# Altium PCB CR00026.PcbDoc
Units mm, origin at the board's own origin, x right, y up, seen from the top; angles counter-clockwise.
Board outline 22 x 57.5 mm, 6 copper layers (L 01 S, L02 G, L03 P, L04 P, L05 G, L 06 S), stack 1.93 mm thick; 54 components, 74 nets, 240 pads, 79 vias.
Unrouted connection lines stored in the file: 38.
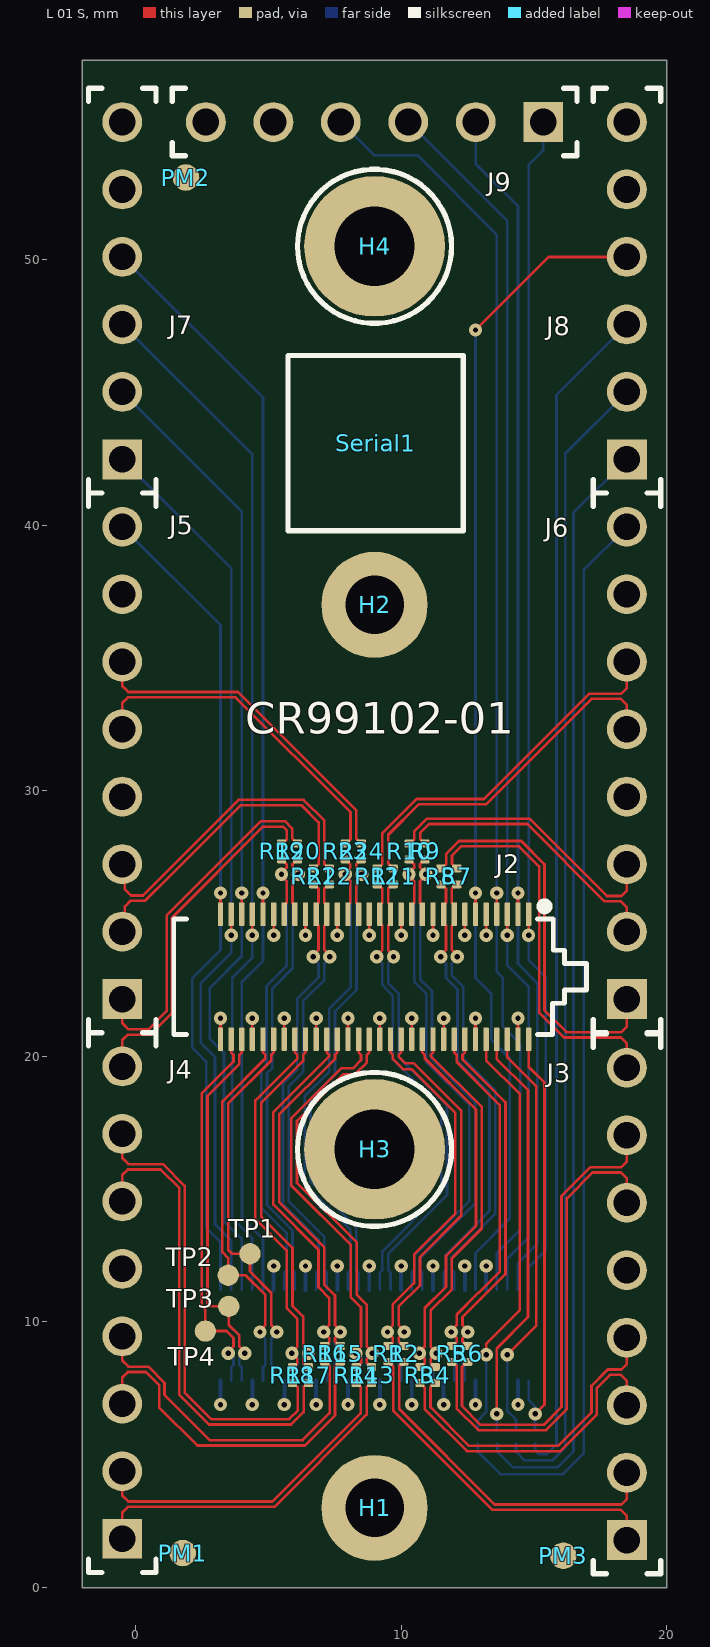
[diagram p0: L 01 S view]
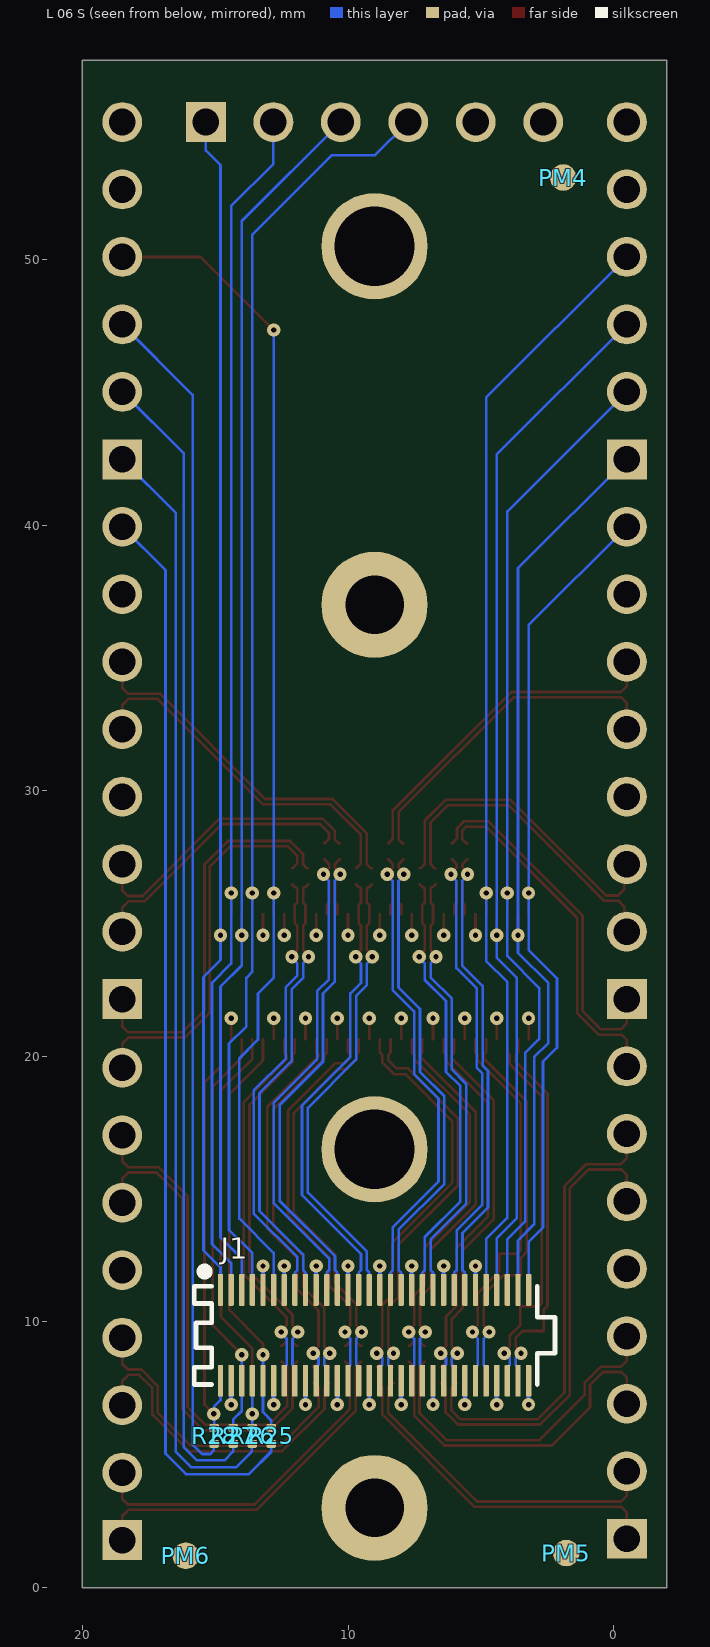
[diagram p1: L 06 S view, seen from below]
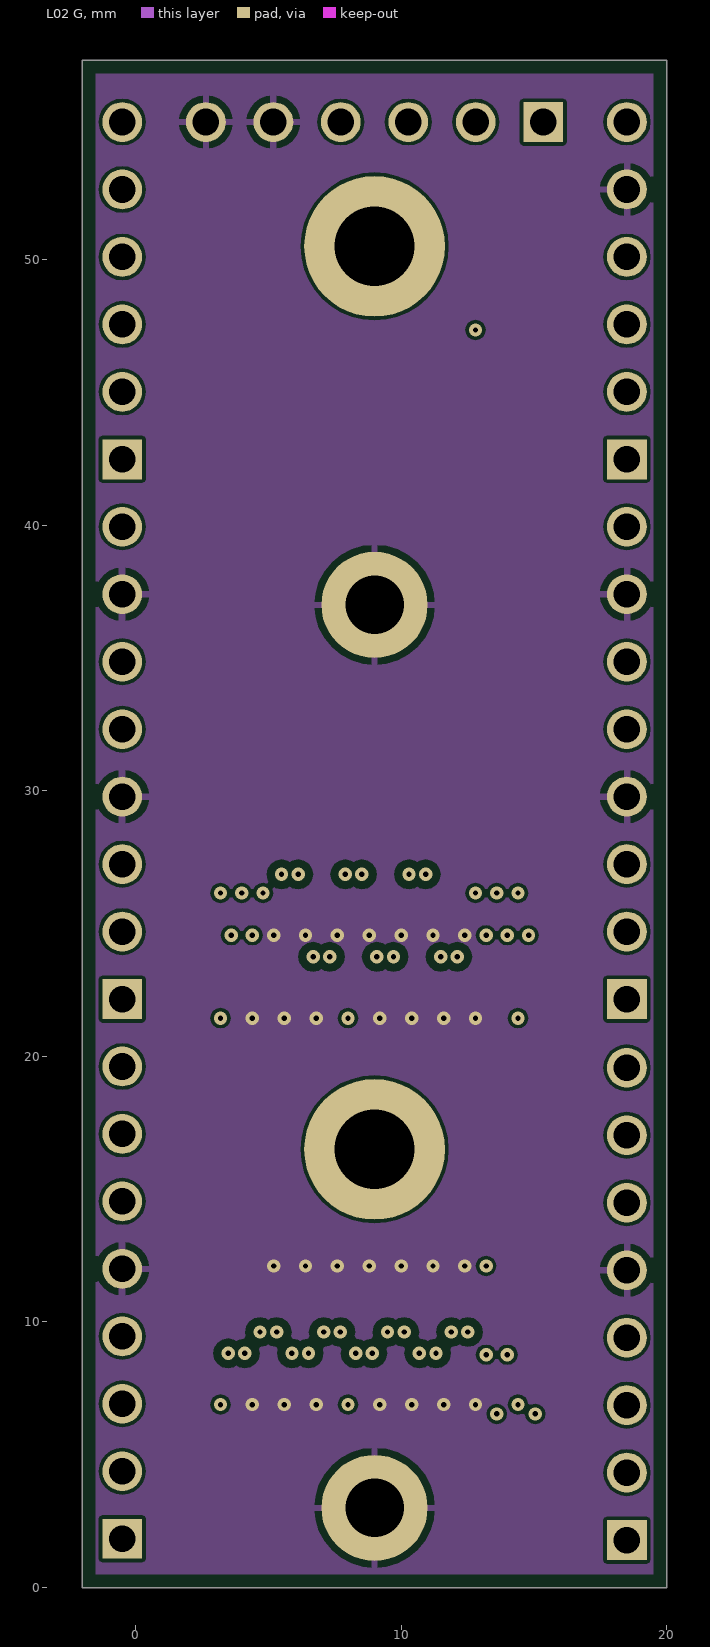
[diagram p2: L02 G]
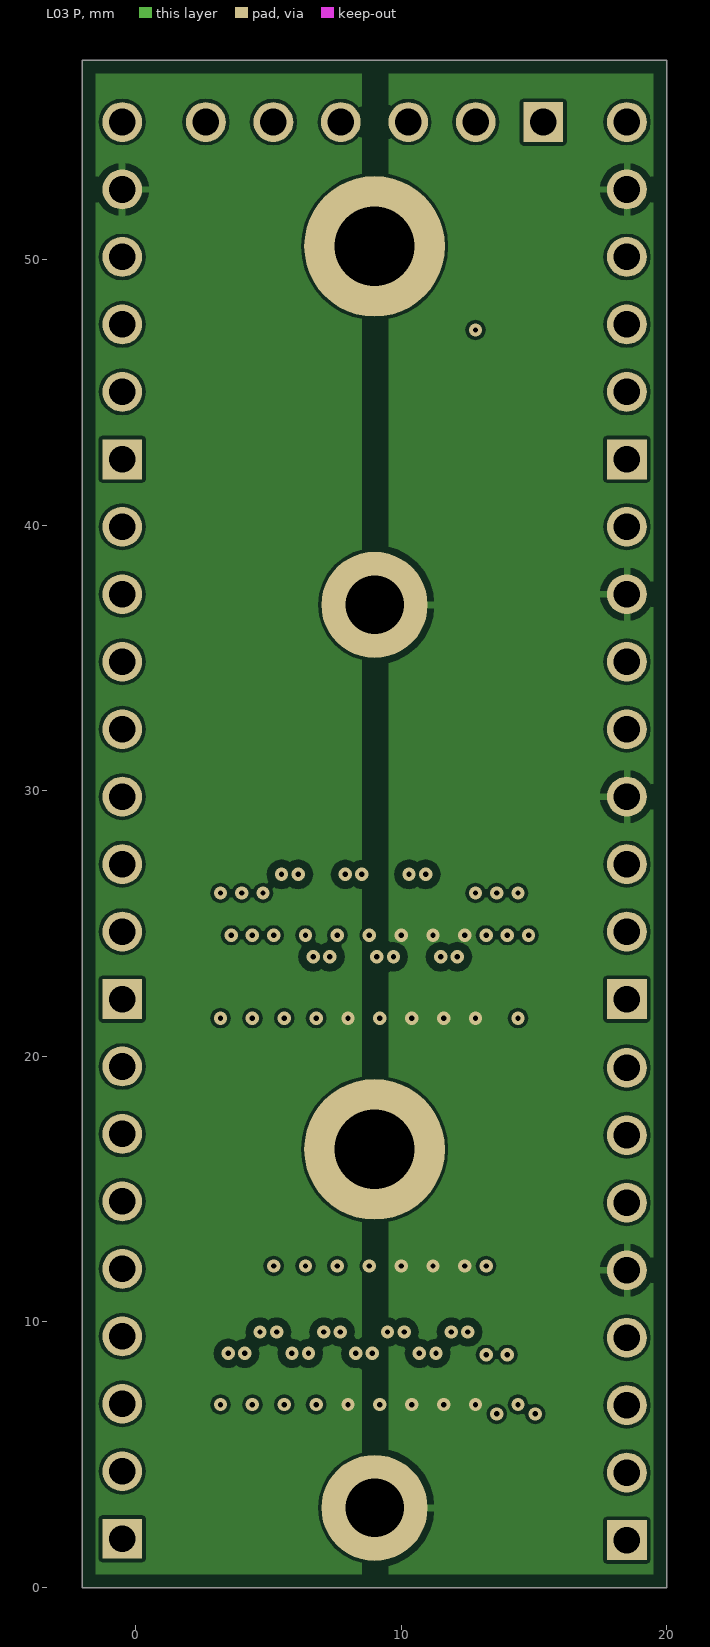
[diagram p3: L03 P]
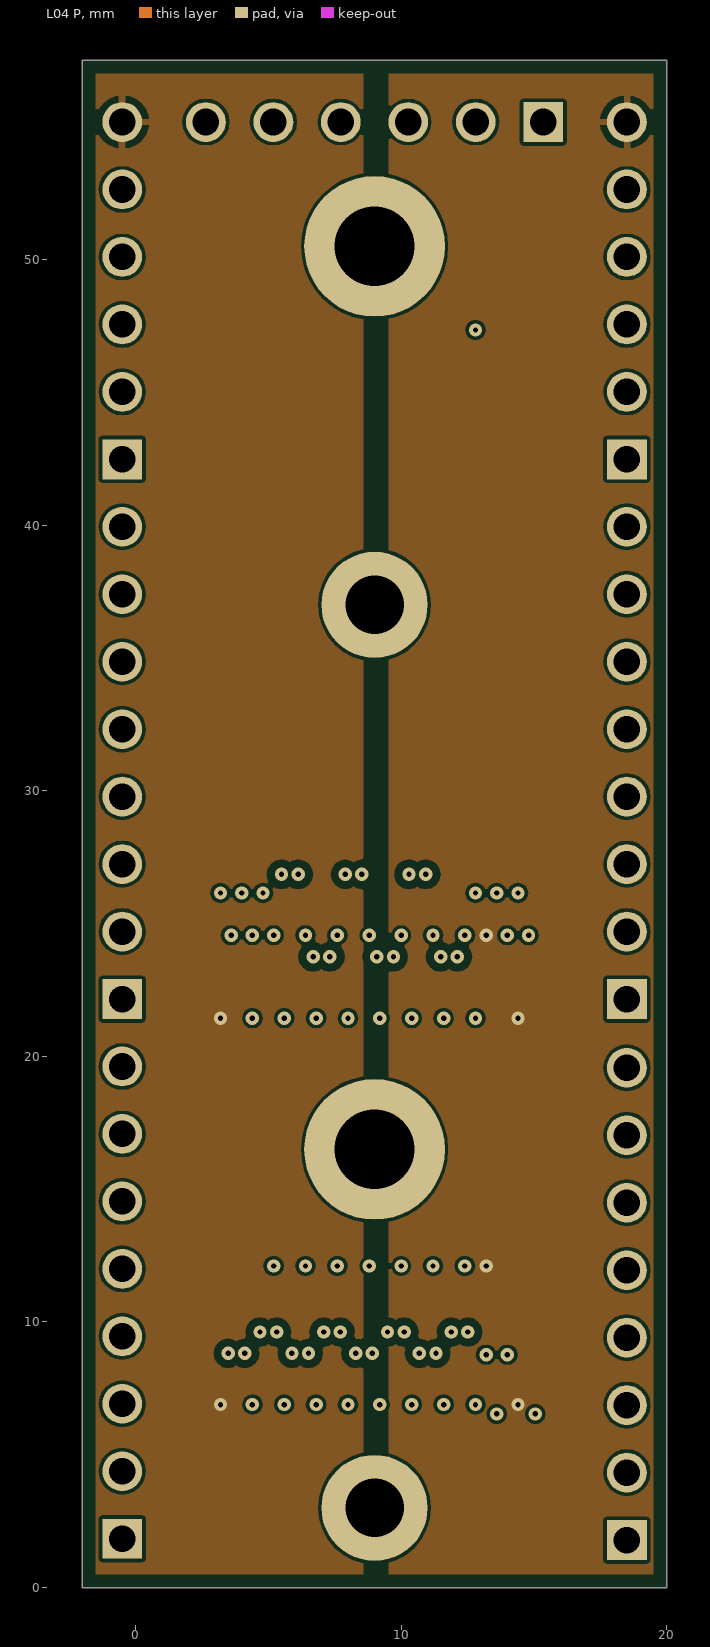
[diagram p4: L04 P]
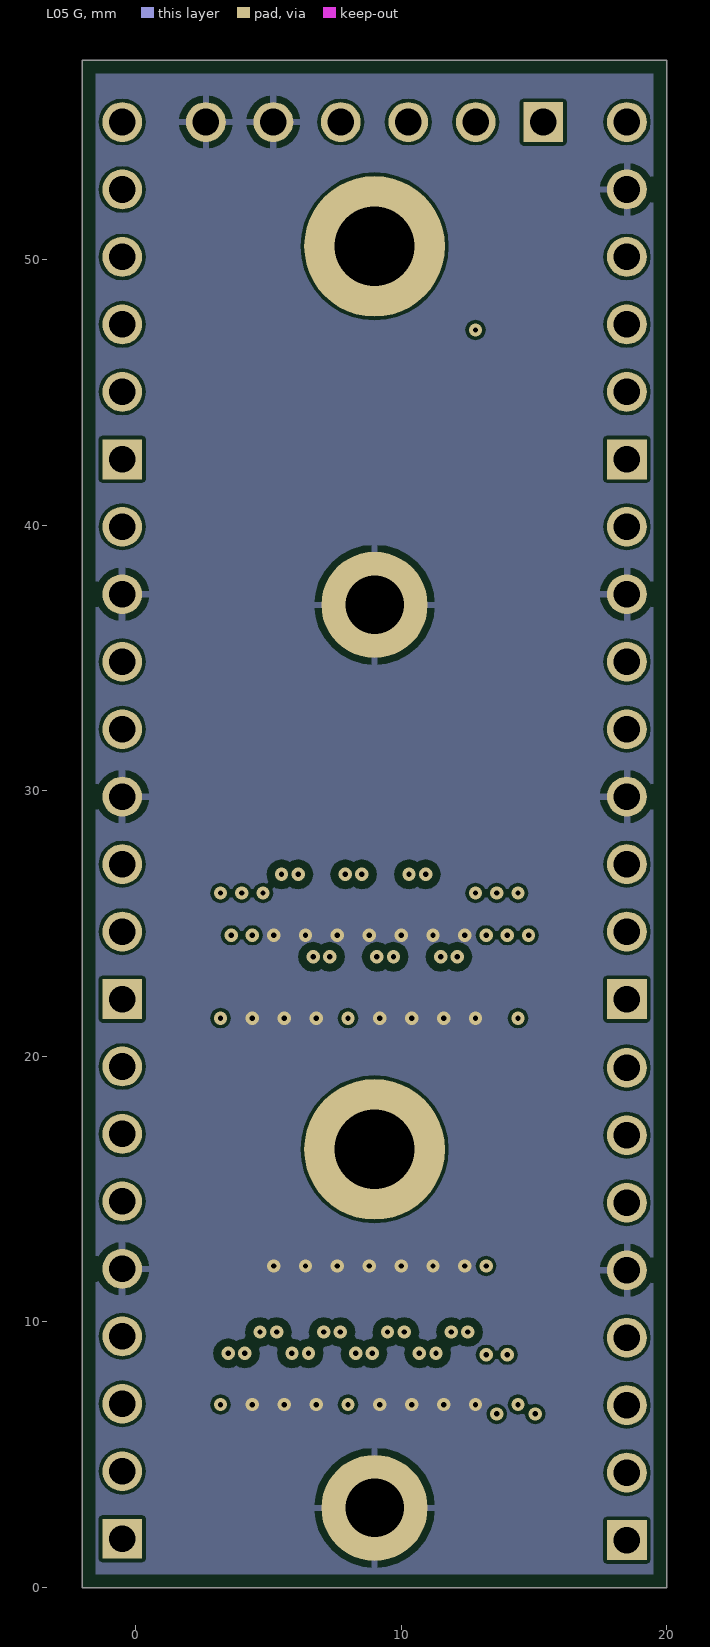
[diagram p5: L05 G]

## Layer stack, top to bottom
Top Solder: solder mask 0.0102, Solder Resist, Dk 3.5
L 01 S: signal copper 0.053
Dielectric 1: prepreg 0.0711, PP-006, Dk 4.1
L02 G: signal copper 0.035
Dielectric 3: prepreg 0.0711, PP-006, Dk 4.1
L03 P: signal copper 0.035
Dielectric1: core 1.4, FR-4, Dk 4.2
L04 P: signal copper 0.035
Dielectric 4: prepreg 0.0711, PP-006, Dk 4.1
L05 G: signal copper 0.035
Dielectric 2: prepreg 0.0711, PP-006, Dk 4.1
L 06 S: signal copper 0.053
Bottom Solder: solder mask 0.0102, Solder Resist, Dk 3.5

## Board outline
-2,0 -2,57.5 20,57.5 20,0

## Design rules (kind name [scope] priority, off if disabled: settings)
BoardOutlineClearance [All] p1: gap=0 except(0.5: Arc-OutlineEdge Track-OutlineEdge SMDPad-OutlineEdge THPad-OutlineEdge Via-OutlineEdge Fill-OutlineEdge Poly-OutlineEdge Region-OutlineEdge)
Clearance "HV Clearance" [(InNetClass('HV') AND InPolygon)] p1: gap=0.3
Clearance Clearance_ToUnplatedHole [IsPad and ( (HoleSize = 1.5) or (HoleSize = 3.25) ) vs (IsVia or IsTrack OR InPoly)] p2: gap=0.2
Clearance Clearance_DiffPair [(InDifferentialPairClass('All Differential Pairs')) vs (InPolygon)] p3: gap=0.3
Clearance [All] p4: gap=0.125 except(0.1: Track-Track Track-SMDPad Track-Via SMDPad-Via)
ComponentClearance ComponentClearance_logo [(HasFootprint('LOGO PRINT') or HasFootprint('FIDU-DOT - small'))] p1: gap=-0.05 collisioncheckmode=3 verticalgap=-0.1 showdistances=FALSE
ComponentClearance [All] p2: gap=-0.05 collisioncheckmode=3 verticalgap=0.254 showdistances=FALSE
DiffPairsRouting [All] p1: maxlimit=0.12 minlimit=0.12 mostfreqgap=0.12 toplayer_minwidth=0.1 toplayer_maxwidth=0.1 toplayer_prefwidth=0.1 midlayer1_minwidth=0.1 midlayer1_maxwidth=0.1 midlayer1_prefwidth=0.1 midlayer2_minwidth=0.1 midlayer2_maxwidth=0.1 midlayer2_prefwidth=0.1 midlayer3_minwidth=0.1 midlayer3_maxwidth=0.1 midlayer3_prefwidth=0.1 midlayer4_minwidth=0.1 midlayer4_maxwidth=0.1 midlayer4_prefwidth=0.1 bottomlayer_minwidth=0.1 bottomlayer_maxwidth=0.1 bottomlayer_prefwidth=0.1 maxuncoupledlength=4
FabricationTestPointUsage TestPointUsage [All] p1: valid=0 allowmultiple=FALSE
FabricationTestpoint Testpoint [All] p1: side=3 testpointundercomponent=TRUE minsize=1.016 maxsize=2.54 preferedsize=1.524 minholesize=0 maxholesize=1.016 preferedholesize=0.813 testpointgrid=0.025 allowsidetop=TRUE allowsidebottom=TRUE usegrid=TRUE gridtolerance=0
HoleSize [All] p1: absolutevalues=TRUE maxlimit=5 minlimit=0.2 maxpercent=80.000 minpercent=20.000
MinimumAnnularRing [All] p1: minimumring=0.15
MinimumSolderMaskSliver [All] p1: minsoldermaskwidth=0.1
PlaneClearance [All] p1: clearance=0.4
PlaneConnect [All] p1: planeconnectstyle=Direct reliefexpansion=0.508 reliefentries=4 reliefconductorwidth=0.254 reliefairgap=0.254
PolygonConnect [IsVia] p1: connectstyle=Direct reliefconductorwidth=0.254 reliefentries=4 polygonreliefangle="90 Angle" airgapwidth=0.254
PolygonConnect PolygonConnect_1 [All] p2: connectstyle=Relief reliefconductorwidth=0.254 reliefentries=4 polygonreliefangle="90 Angle" airgapwidth=0.254
RoutingCorners [All] p1: cornerstyle=Round minsetback=2 maxsetback=2
RoutingVias [All] p1: holewidth=0.3 width=0.6 viastyle="Through Hole" minholewidth=0.2 minwidth=0.5 maxholewidth=1 maxwidth=3
SilkToSilkClearance [All] p1: silktosilkclearance=0.025
SilkToSolderMaskClearance SilkscreenOverComponentPads [IsPad] p1: minsilkscreentomaskgap=0.01 clearancetoexposedcopper=TRUE
SolderMaskExpansion SolderMaskExpansion_VIA [(IsVia)] p1: expansion=0 soldermaskfromhole=TRUE
SolderMaskExpansion [All] p2: expansion=0
Width [All] p1: maxlimit=3 minlimit=0.1 preferedwidth=0.2 toplayer_prefwidth=0.1 midlayer1_minwidth=0.11 midlayer4_minwidth=0.11 bottomlayer_prefwidth=0.1 minimp=50.000000 maximp=50.000000 favimp=50.000000 checkconnectedcopper=TRUE
19 further rules are at their usual default settings.

## Classes and differential pairs
component class headers: J3 J4 J5 J6 J7 J8 J9 R1 R2 R3 R4 R5 R6 R7 R8 R9 R10 R11 R12 R13 R14 R15 R16 R17 R18 R19 R20 R21 R22 R23 R24 R25 R26 R27 R28 R? TP1 TP2 TP3 TP4
net class HS: A0_N A0_P A1_N A1_P A2_N A2_P A3_N A3_P A4_N A4_P A5_N A5_P B0_N B0_P B1_N B1_P B2_N B2_P B3_N B3_P B4_N B4_P B5_N B5_P RFU2_N RFU2_P RFU3_N RFU3_P
component class CR00026: PM1 PM2 PM3 PM4 PM5 PM6 Serial1
component class CRUVI: H1 H2 H3 H4 J1 J2 SNAP1 SNAP2
differential pair RFU3: +RFU3_P -RFU3_N
differential pair RFU2: +RFU2_P -RFU2_N
differential pair B5: +B5_P -B5_N
differential pair B4: +B4_P -B4_N
differential pair B3: +B3_P -B3_N
differential pair B2: +B2_P -B2_N
differential pair B1: +B1_P -B1_N
differential pair B0: +B0_P -B0_N
differential pair A5: +A5_P -A5_N
differential pair A4: +A4_P -A4_N
differential pair A3: +A3_P -A3_N
differential pair A2: +A2_P -A2_N
differential pair A1: +A1_P -A1_N
differential pair A0: +A0_P -A0_N

## Components (designator, comment, footprint, x,y, rotation, side; value= is the part's Value field where it differs from the comment)
H1 "Mount.Hole 2mm" MHole2_2mm 9,3 r0 top locked
H2 "Mount.Hole 2mm" MHole2_2mm 9,37 r0 top
H3 "Steel Spacer M2 5mm SMD" 9774050243 9,16.5 r0 top locked
H4 "Steel Spacer M2 5mm SMD" 9774050243 9,50.5 r0 top
J1 "ST4-30-1.50-L-D-P-TR" ST4-30-1_50-L-D 9,9.5 r180 bottom locked
J2 "SS4-30-3.50-L-D-K-TR" SS4-30-3_50-L-D 9,23 r180 top
J3 "Pin Header 2.54 1Row 8Pins" "STIFTLEISTE2_54 OG 1R-8V" 18.5,10.68 r90 top
J4 "Pin Header 2.54 1Row 8Pins" "STIFTLEISTE2_54 OG 1R-8V" -0.5,10.73 r90 top
J5 "Pin Header 2.54 1Row 8Pins" "STIFTLEISTE2_54 OG 1R-8V" -0.5,31.05 r90 top
J6 "Pin Header 2.54 1Row 8Pins" "STIFTLEISTE2_54 OG 1R-8V" 18.5,31.05 r90 top
J7 "Pin Header 2.54 1Row 6Pins" "STIFTLEISTE2_54 OG 1R-6" -0.5,48.83 r90 top
J8 "Pin Header 2.54 1Row 6Pins" "STIFTLEISTE2_54 OG 1R-6" 18.5,48.83 r90 top
J9 "Pin Header 2.54 1Row 6Pins" "STIFTLEISTE2_54 OG 1R-6" 9,55.18 r180 top
PM1 "FIDU-DOT - mini" "FIDU-DOT - mini" 1.78,1.3 r0 top
PM2 "FIDU-DOT - mini" "FIDU-DOT - mini" 1.9,53.09 r0 top
PM3 "FIDU-DOT - mini" "FIDU-DOT - mini" 16.11,1.2 r90 top
PM4 "FIDU-DOT - mini" "FIDU-DOT - mini" 1.9,53.09 r180 bottom
PM5 "FIDU-DOT - mini" "FIDU-DOT - mini" 1.78,1.3 r180 bottom
PM6 "FIDU-DOT - mini" "FIDU-DOT - mini" 16.11,1.2 r90 bottom
R1 "49R9" RESC0603X26N_V 9.51,8.8 r0 top
R2 "49R9" RESC0603X26N_V 10.11,8.8 r0 top
R3 "49R9" RESC0603X26N_V 10.71,8 r0 top
R4 "49R9" RESC0603X26N_V 11.285,8 r0 top
R5 "49R9" RESC0603X26N_V 11.91,8.8 r0 top
R6 "49R9" RESC0603X26N_V 12.51,8.8 r0 top
R7 "49R9" RESC0603X26N_V 12.1,26.78 r180 top
R8 "49R9" RESC0603X26N_V 11.5,26.78 r180 top
R9 "49R9" RESC0603X26N_V 10.9,27.72 r180 top
R10 "49R9" RESC0603X26N_V 10.3,27.72 r180 top
R11 "49R9" RESC0603X26N_V 9.7,26.78 r180 top
R12 "49R9" RESC0603X26N_V 9.1,26.78 r180 top
R13 "49R9" RESC0603X26N_V 8.885,8 r0 top
R14 "49R9" RESC0603X26N_V 8.31,8 r0 top
R15 "49R9" RESC0603X26N_V 7.71,8.8 r0 top
R16 "49R9" RESC0603X26N_V 7.123,8.8 r0 top
R17 "49R9" RESC0603X26N_V 6.51,8 r0 top
R18 "49R9" RESC0603X26N_V 5.91,8 r0 top
R19 "49R9" RESC0603X26N_V 5.5,27.72 r180 top
R20 "49R9" RESC0603X26N_V 6.1,27.72 r180 top
R21 "49R9" RESC0603X26N_V 6.7,26.78 r180 top
R22 "49R9" RESC0603X26N_V 7.3,26.78 r180 top
R23 "49R9" RESC0603X26N_V 7.9,27.72 r180 top
R24 "49R9" RESC0603X26N_V 8.5,27.72 r180 top
R25 "49R9" RESC0603X26N_V 12.89,5.715 r180 bottom
R26 "49R9" RESC0603X26N_V 13.607,5.715 r180 bottom
R27 "49R9" RESC0603X26N_V 14.323,5.715 r180 bottom
R28 "49R9" RESC0603X26N_V 15.04,5.715 r180 bottom
Serial1 "Serialnumber 6,3 x 6.3mm" Serial_6.3x6.3mm 9.04,43.09 r0 top
SNAP1 "SNAP CRUVI 3x" CRUVI_3X_SNAP 31.86,28 r0 top locked
SNAP2 "SNAP CRUVI 3x" CRUVI_3x_Snap 31.86,41.5 r0 top locked
TP1 "Testpoint 0.8mm" TP_0.8mm 4.31,12.57 r90 top
TP2 "Testpoint 0.8mm" TP_0.8mm 3.49,11.76 r90 top
TP3 "Testpoint 0.8mm" TP_0.8mm 3.51,10.59 r90 top
TP4 "Testpoint 0.8mm" TP_0.8mm 2.63,9.66 r90 top

## Footprints (in the part's own frame and the unit in brackets; to place one, negate y for a bottom-side part, rotate by r counter-clockwise, add the part's x,y. Pads: shape width x height; smd on the part's side, far side on the other; paste and mask are expansions set on the pad)
9774050243 [mm]
  round 5.3 / inner round 5.3 / far side round 4 hole 3: 1(0,0)
  silkscreen extent -2.9,-2.9 2.9,2.9, body extent -2.17,-2.17 2.18,2.17, height 5
CRUVI_3X_SNAP [mm]
CRUVI_3x_Snap [mm]
"FIDU-DOT - mini" [mm]
  round 1 smd paste-1: 0(0,0)
MHole2_2mm [mm]
  round 4 hole 2.2: 1(0,0)
RESC0603X26N_V [mm]
  rrect33% 0.35x0.3 smd: 1(0,0.3) 2(0,-0.3)
  body extent -0.16,-0.34 0.17,0.34, height 0.32
Serial_6.3x6.3mm [mm]
  silkscreen extent -3.3,-3.3 3.3,3.3, body extent -3,-3 3,3, height 0.21
SS4-30-3_50-L-D [mm]
  rrect33% 0.2x0.89 smd: 1(-5.8,-2.355) 2(-5.8,2.355) 3(-5.4,-2.355) 4(-5.4,2.355) 5(-5,-2.355) 6(-5,2.355) 7(-4.6,-2.355) 8(-4.6,2.355) 9(-4.2,-2.355) 10(-4.2,2.355) 11(-3.8,-2.355) 12(-3.8,2.355) 13(-3.4,-2.355) 14(-3.4,2.355) 15(-3,-2.355) 16(-3,2.355) 17(-2.6,-2.355) 18(-2.6,2.355) 19(-2.2,-2.355) 20(-2.2,2.355) 21(-1.8,-2.355) 22(-1.8,2.355) 23(-1.4,-2.355) 24(-1.4,2.355) 25(-1,-2.355) 26(-1,2.355) 27(-0.6,-2.355) 28(-0.6,2.355) 29(-0.2,-2.355) 30(-0.2,2.355) 31(0.2,-2.355) 32(0.2,2.355) 33(0.6,-2.355) 34(0.6,2.355) 35(1,-2.355) 36(1,2.355) 37(1.4,-2.355) 38(1.4,2.355) 39(1.8,-2.355) 40(1.8,2.355) 41(2.2,-2.355) 42(2.2,2.355) 43(2.6,-2.355) 44(2.6,2.355) 45(3,-2.355) 46(3,2.355) 47(3.4,-2.355) 48(3.4,2.355) 49(3.8,-2.355) 50(3.8,2.355) 51(4.2,-2.355) 52(4.2,2.355) 53(4.6,-2.355) 54(4.6,2.355) 55(5,-2.355) 56(5,2.355) 57(5.4,-2.355) 58(5.4,2.355) 59(5.8,-2.355) 60(5.8,2.355)
  silkscreen extent -7.98,-2.8 7.56,2.17, body extent -7.98,-2.5 7.56,2.5, height 3.98
ST4-30-1_50-L-D [mm]
  rrect33% 0.2x1.2 smd: 1(-5.8,1.71) 2(-5.8,-1.71) 3(-5.4,1.71) 4(-5.4,-1.71) 5(-5,1.71) 6(-5,-1.71) 7(-4.6,1.71) 8(-4.6,-1.71) 9(-4.2,1.71) 10(-4.2,-1.71) 11(-3.8,1.71) 12(-3.8,-1.71) 13(-3.4,1.71) 14(-3.4,-1.71) 15(-3,1.71) 16(-3,-1.71) 17(-2.6,1.71) 18(-2.6,-1.71) 19(-2.2,1.71) 20(-2.2,-1.71) 21(-1.8,1.71) 22(-1.8,-1.71) 23(-1.4,1.71) 24(-1.4,-1.71) 25(-1,1.71) 26(-1,-1.71) 27(-0.6,1.71) 28(-0.6,-1.71) 29(-0.2,1.71) 30(-0.2,-1.71) 31(0.2,1.71) 32(0.2,-1.71) 33(0.6,1.71) 34(0.6,-1.71) 35(1,1.71) 36(1,-1.71) 37(1.4,1.71) 38(1.4,-1.71) 39(1.8,1.71) 40(1.8,-1.71) 41(2.2,1.71) 42(2.2,-1.71) 43(2.6,1.71) 44(2.6,-1.71) 45(3,1.71) 46(3,-1.71) 47(3.4,1.71) 48(3.4,-1.71) 49(3.8,1.71) 50(3.8,-1.71) 51(4.2,1.71) 52(4.2,-1.71) 53(4.6,1.71) 54(4.6,-1.71) 55(5,1.71) 56(5,-1.71) 57(5.4,1.71) 58(5.4,-1.71) 59(5.8,1.71) 60(5.8,-1.71)
  silkscreen extent -6.79,-1.85 6.79,2.55, body extent -6.87,-2 6.71,2, height 3.56
"STIFTLEISTE2_54 OG 1R-6" [mm]
  rect 1.5x1.5 hole 1: 1(-6.35,0)
  round 1.5 hole 1: 2(-3.81,0) 3(-1.27,0) 4(1.27,0) 5(3.81,0) 6(6.35,0)
  silkscreen extent -7.62,-1.27 7.62,1.27, body extent -7.52,-1.27 7.72,1.23, height 8.2
"STIFTLEISTE2_54 OG 1R-8V" [mm]
  rect 1.5x1.5 hole 1: 1(-8.89,0)
  round 1.5 hole 1: 2(-6.35,0) 3(-3.81,0) 4(-1.27,0) 5(1.27,0) 6(3.81,0) 7(6.35,0) 8(8.89,0)
  silkscreen extent -10.16,-1.27 10.16,1.27, body extent -10.08,-1.23 10.24,1.27, height 8.2
TP_0.8mm [mm]
  round 0.8 smd paste-1: 1(0,0)

## Part data
H1 H2: library part 27273
H3 H4: library part 29745, "9774050243R"
J1: library part 29686
J2: library part 29747, "SS4-30-3.50-L-D-K"
J3 J4 J5 J6: library part 29846, "Stiftleiste versetzt 1-reihig, 8pol."
J7 J8 J9: library part 28042, "Stiftleiste gerade 1-reihig, 6pol"
PM1 PM2 PM3 PM4 PM5 PM6: library part 27037, "FIDU-DOT - MINI 0.5mm"
R1 R2 R3 R4 R5 R6 R7 R8 R9 R10 R11 R12 R13 R14 R15 R16 R17 R18 R19 R20 R21 R22 R23 R24 R25 R26 R27 R28: library part 26669, "WID SMD 49R9 1% 0,05W BF 0603 (0201)"
Serial1: library part 26753
SNAP1 SNAP2: library part 29977, "SNAP for CRUVI 3x"
TP1 TP2 TP3 TP4: library part 26289

## Via types
v1: diameter 0.5, hole 0.2, L 01 S to L 06 S, 79 vias

## Nets (pads, with @x,y where several pads share a name; then routed paths per layer and width w, separated by ;. In a path a pad name is that pad's centre, name@x,y a point inside that pad or via, vN(x,y) a via of type N, cw(c..) or ccw(c..) an arc to the next point about the centre after c; other vN are vias at no path point)
3.3V: J1.4 J1.9 J2.4 J2.9 J8.6 | length 3.4
  L 01 S w0.1: v1(13.2,24.56) J2.9 ; J2.4 v1(14.4,21.44)
  L 06 S w0.15: J1.9 v1(13.2,12.11) ; v1(14.4,6.89) J1.4
5V: J1.60 J2.60 J7.6 | length 1.7
  L 01 S w0.1: J2.60 v1(3.2,21.44)
  L 06 S w0.15: v1(3.2,6.89) J1.60
A0_N: J1.16 J2.16 R5.1 | length 15.1
  L 01 S w0.1: R5.1 11.935,9.1 12.09,9.255 12.09,9.4 11.888,9.602 v1(11.888,9.62) 11.888,9.676 12.09,9.879 12.09,10.074 12.09,10.273 12.922,11.104 12.924,11.104 13.71,11.89 13.71,18.179 12.09,19.799 12.09,20.06 12,20.15 J2.16
  L 06 S w0.1: v1(11.888,9.62) 11.888,9.564 12.09,9.361 12.09,8.38 12,8.29 J1.16
A0_P: J1.14 J2.14 R6.1 | length 15.1
  L 01 S w0.1: J2.14 12.4,20.15 12.31,20.06 12.31,19.89 13.93,18.27 13.93,11.799 13.015,10.884 13.013,10.884 12.31,10.181 12.31,9.983 12.31,9.879 12.513,9.676 v1(12.513,9.62) 12.513,9.603 12.31,9.4 12.31,9.275 12.485,9.1 R6.1
  L 06 S w0.1: J1.14 12.4,8.29 12.31,8.38 12.31,9.361 12.513,9.564 v1(12.513,9.62)
A1_N: J1.22 J2.22 R3.1 | length 15.4
  L 01 S w0.1: R3.1 10.735,8.3 10.89,8.455 10.89,8.6 10.688,8.802 v1(10.688,8.82) 10.688,8.876 10.89,9.079 10.89,9.505 10.89,10.52 11.69,11.32 11.69,12.491 12.82,13.621 12.82,18 10.89,19.93 10.89,20.06 10.8,20.15 J2.22
  L 06 S w0.1: v1(10.688,8.82) 10.74,8.82 10.89,8.67 10.89,8.38 10.8,8.29 J1.22
A1_P: J1.20 J2.20 R4.1 | length 15.4
  L 01 S w0.1: J2.20 11.2,20.15 11.11,20.06 11.11,20.021 13.04,18.091 13.04,13.53 11.91,12.4 11.91,11.229 11.11,10.429 11.11,9.414 11.11,9.079 11.313,8.876 v1(11.313,8.82) 11.313,8.803 11.11,8.6 11.11,8.475 R4.1 R4.1@11.31,8.3
  L 06 S w0.1: J1.20 11.2,8.29 11.11,8.38 11.11,8.67 11.26,8.82 v1(11.313,8.82)
A2_N: J1.28 J2.28 R1.1 | length 15.9
  L 01 S w0.1: R1.1 9.535,9.1 9.69,9.255 9.69,9.4 9.488,9.602 v1(9.488,9.62) 9.488,9.676 9.69,9.879 9.69,10.12 9.69,10.671 10.49,11.471 10.49,12.541 12.04,14.091 12.04,17.87 10.39,19.52 10.069,19.52 9.69,19.899 9.69,20.06 9.6,20.15 J2.28
  L 06 S w0.1: v1(9.488,9.62) 9.488,9.564 9.69,9.361 9.69,8.38 9.6,8.29 J1.28
A2_P: J1.26 J2.26 R2.1 | length 15.9
  L 01 S w0.1: J2.26 10,20.15 9.91,20.06 9.91,19.99 10.16,19.74 10.481,19.74 12.26,17.961 12.26,14 10.71,12.45 10.71,11.38 9.91,10.58 9.91,10.029 9.91,9.879 10.113,9.676 v1(10.113,9.62) 10.113,9.603 9.91,9.4 9.91,9.275 10.085,9.1 R2.1
  L 06 S w0.1: J1.26 10,8.29 9.91,8.38 9.91,9.361 10.113,9.564 v1(10.113,9.62)
A3_N: J1.34 J2.34 R14.1 | length 16.3
  L 01 S w0.1: R14.1 8.335,8.3 8.49,8.455 8.49,8.6 8.288,8.802 v1(8.288,8.82) 8.288,8.876 8.49,9.079 8.49,9.795 8.49,10.55 8.11,10.93 8.11,12.899 5.86,15.149 5.86,17.666 7.744,19.55 8.18,19.55 8.49,19.86 8.49,20.06 8.4,20.15 J2.34
  L 06 S w0.1: v1(8.288,8.82) 8.34,8.82 8.49,8.67 8.49,8.38 8.4,8.29 J1.34
A3_P: J1.32 J2.32 R13.1 | length 16.3
  L 01 S w0.1: J2.32 8.8,20.15 8.71,20.06 8.71,19.769 8.271,19.33 7.835,19.33 6.08,17.575 6.08,15.24 8.33,12.99 8.33,11.021 8.71,10.641 8.71,9.704 8.71,9.079 8.913,8.876 v1(8.913,8.82) 8.913,8.803 8.71,8.6 8.71,8.475 R13.1 R13.1@8.91,8.3
  L 06 S w0.1: J1.32 8.8,8.29 8.71,8.38 8.71,8.67 8.86,8.82 v1(8.913,8.82)
A4_N: J1.40 J2.40 R16.1 | length 15.5
  L 01 S w0.1: R16.1@7.11,9.1 7.135,9.1 7.29,9.255 7.29,9.4 7.088,9.602 v1(7.088,9.62) 7.088,9.676 7.29,9.879 7.29,10.91 6.89,11.31 6.89,12.72 5.19,14.42 5.19,17.901 7.29,20.001 7.29,20.06 7.2,20.15 J2.40
  L 06 S w0.1: v1(7.088,9.62) 7.088,9.564 7.29,9.361 7.29,8.38 7.2,8.29 J1.40
A4_P: J1.38 J2.38 R15.1 | length 15.5
  L 01 S w0.1: J2.38 7.6,20.15 7.51,20.06 7.51,19.91 5.41,17.81 5.41,14.511 7.11,12.811 7.11,11.401 7.51,11.001 7.51,9.879 7.713,9.676 v1(7.713,9.62) 7.713,9.603 7.51,9.4 7.51,9.275 7.685,9.1 R15.1
  L 06 S w0.1: J1.38 7.6,8.29 7.51,8.38 7.51,9.361 7.713,9.564 v1(7.713,9.62)
A5_N: J1.46 J2.46 R18.1 | length 15.1
  L 01 S w0.1: R18.1 5.935,8.3 6.09,8.455 6.09,8.6 5.888,8.802 v1(5.888,8.82) 5.888,8.876 6.09,9.079 6.09,10.119 5.69,10.519 5.69,12.699 4.51,13.879 4.51,18.34 6.09,19.92 6.09,20.06 6,20.15 J2.46
  L 06 S w0.1: v1(5.888,8.82) 5.94,8.82 6.09,8.67 6.09,8.38 6,8.29 J1.46
A5_P: J1.44 J2.44 R17.1 | length 15.1
  L 01 S w0.1: J2.44 6.4,20.15 6.31,20.06 6.31,19.829 4.73,18.249 4.73,13.97 5.91,12.79 5.91,10.61 6.31,10.21 6.31,9.079 6.513,8.876 v1(6.513,8.82) 6.513,8.803 6.31,8.6 6.31,8.475 6.485,8.3 R17.1
  L 06 S w0.1: J1.44 6.4,8.29 6.31,8.38 6.31,8.67 6.46,8.82 v1(6.513,8.82)
B0_N: J1.17 J2.17 R8.1 | length 17
  L 01 S w0.1: v1(11.487,23.751) 11.487,23.808 11.69,24.01 11.69,24.92 11.6,25.01 J2.17 11.6,25.7 11.69,25.79 11.69,26.18 11.69,26.321 11.631,26.38 11.6,26.38 R8.1
  L 06 S w0.1: v1(11.487,23.751) 11.487,23.695 11.69,23.493 11.69,22.949 12.12,22.519 12.12,19.829 13.33,18.619 13.33,14.18 11.69,12.54 11.69,11.95 11.6,11.86 J1.17
B0_P: J1.15 J2.15 R7.1 | length 17
  L 01 S w0.1: R7.1 12,26.38 11.969,26.38 11.91,26.321 11.91,26.089 11.91,25.79 12,25.7 J2.15 12,25.01 11.91,24.92 11.91,24.01 12.112,23.808 v1(12.112,23.751)
  L 06 S w0.1: J1.15 12,11.86 11.91,11.95 11.91,12.449 13.55,14.089 13.55,18.71 12.34,19.92 12.34,22.61 11.91,23.04 11.91,23.493 12.112,23.695 v1(12.112,23.751)
B1_N: J1.23 J2.23 R10.1 | length 19.8
  L 01 S w0.1: R10.1 10.325,27.42 10.425,27.32 10.425,27.295 10.49,27.23 10.49,27.112 10.297,26.92 v1(10.297,26.854) 10.297,26.788 10.49,26.595 10.49,25.79 10.4,25.7 J2.23
  L 06 S w0.1: v1(10.297,26.854) 10.297,26.797 10.5,26.595 10.5,22.81 10.94,22.37 10.94,19.799 12.57,18.169 12.57,14.561 10.49,12.481 10.49,11.95 10.4,11.86 J1.23
B1_P: J1.21 J2.21 R9.1 | length 19.9
  L 01 S w0.1: J2.21 10.8,25.7 10.71,25.79 10.71,26.595 10.922,26.807 v1(10.922,26.854) 10.922,26.9 10.71,27.112 10.71,27.23 10.775,27.295 10.775,27.32 10.875,27.42 R9.1
  L 06 S w0.1: J1.21 10.8,11.86 10.71,11.95 10.71,12.39 12.79,14.47 12.79,18.26 11.16,19.89 11.16,22.461 10.72,22.901 10.72,26.595 10.922,26.798 v1(10.922,26.854)
B2_N: J1.29 J2.29 R12.1 | length 17.5
  L 01 S w0.1: v1(9.088,23.751) 9.088,23.808 9.29,24.01 9.29,24.92 9.2,25.01 J2.29 9.2,25.7 9.29,25.79 9.29,26.18 9.29,26.321 9.231,26.38 9.2,26.38 R12.1
  L 06 S w0.1: v1(9.088,23.751) 9.088,23.695 9.29,23.493 9.29,22.68 9.69,22.28 9.69,19.879 11.51,18.059 11.51,14.871 9.29,12.651 9.29,11.95 9.2,11.86 J1.29
B2_P: J1.27 J2.27 R11.1 | length 17.5
  L 01 S w0.1: R11.1 9.6,26.38 9.569,26.38 9.51,26.321 9.51,26.089 9.51,25.79 9.6,25.7 J2.27 9.6,25.01 9.51,24.92 9.51,24.01 9.713,23.808 v1(9.713,23.751)
  L 06 S w0.1: J1.27 9.6,11.86 9.51,11.95 9.51,12.56 11.73,14.78 11.73,18.15 9.91,19.97 9.91,22.371 9.51,22.771 9.51,23.493 9.713,23.695 v1(9.713,23.751)
B3_N: J1.35 J2.35 R23.1 | length 19.5
  L 01 S w0.1: R23.1 7.925,27.42 8.025,27.32 8.025,27.295 8.09,27.23 8.09,27.112 7.897,26.92 v1(7.897,26.854) 7.897,26.788 8.09,26.595 8.09,25.79 8,25.7 J2.35
  L 06 S w0.1: v1(7.897,26.854) 7.897,26.797 8.1,26.595 8.1,22.6 7.29,21.79 7.29,19.42 6.37,18.5 6.37,15.199 8.09,13.479 8.09,11.95 8,11.86 J1.35
B3_P: J1.33 J2.33 R24.1 | length 19.6
  L 01 S w0.1: J2.33 8.4,25.7 8.31,25.79 8.31,26.595 8.522,26.807 v1(8.522,26.854) 8.522,26.9 8.31,27.112 8.31,27.23 8.375,27.295 8.375,27.32 8.475,27.42 R24.1
  L 06 S w0.1: J1.33 8.4,11.86 8.31,11.95 8.31,13.57 6.59,15.29 6.59,18.409 7.51,19.329 7.51,21.699 8.32,22.509 8.32,26.595 8.522,26.798 v1(8.522,26.854)
B4_N: J1.41 J2.41 R21.1 | length 16.8
  L 01 S w0.1: v1(6.688,23.751) 6.688,23.808 6.89,24.01 6.89,24.92 6.8,25.01 J2.41 6.8,25.7 6.89,25.79 6.89,26.18 6.89,26.321 6.831,26.38 6.8,26.38 R21.1
  L 06 S w0.1: v1(6.688,23.751) 6.688,23.695 6.89,23.493 6.89,22.971 6.09,22.171 6.09,19.51 5.55,18.97 5.55,14.45 6.89,13.11 6.89,11.95 6.8,11.86 J1.41
B4_P: J1.39 J2.39 R22.1 | length 16.8
  L 01 S w0.1: R22.1 7.2,26.38 7.169,26.38 7.11,26.321 7.11,26.089 7.11,25.79 7.2,25.7 J2.39 7.2,25.01 7.11,24.92 7.11,24.01 7.313,23.808 v1(7.313,23.751)
  L 06 S w0.1: J1.39 7.2,11.86 7.11,11.95 7.11,13.201 5.77,14.541 5.77,18.879 6.31,19.419 6.31,22.08 7.11,22.88 7.11,23.493 7.313,23.695 v1(7.313,23.751)
B5_N: J1.47 J2.47 R19.1 | length 18.9
  L 01 S w0.1: R19.1 5.525,27.42 5.625,27.32 5.625,27.295 5.69,27.23 5.69,27.112 5.497,26.92 v1(5.497,26.854) 5.497,26.788 5.69,26.595 5.69,25.79 5.6,25.7 J2.47
  L 06 S w0.1: v1(5.497,26.854) 5.497,26.797 5.7,26.595 5.7,23.421 4.93,22.651 4.93,19.659 4.73,19.459 4.73,14.31 5.69,13.35 5.69,11.95 5.6,11.86 J1.47
B5_P: J1.45 J2.45 R20.1 | length 18.9
  L 01 S w0.1: J2.45 6,25.7 5.91,25.79 5.91,26.595 6.122,26.807 v1(6.122,26.854) 6.122,26.9 5.91,27.112 5.91,27.23 5.975,27.295 5.975,27.32 6.075,27.42 R20.1
  L 06 S w0.1: J1.45 6,11.86 5.91,11.95 5.91,13.441 4.95,14.401 4.95,19.368 5.15,19.568 5.15,22.56 5.92,23.33 5.92,26.595 6.122,26.798 v1(6.122,26.854)
GND: H1.1 H2.1 J1.12 J1.13 J1.18 J1.19 J1.24 J1.25 J1.30 J1.31 J1.37 J1.42 J1.43 J1.48 J1.49 J1.54 J2.12 J2.13 J2.18 J2.19 J2.24 J2.25 J2.30 J2.31 J2.37 J2.42 J2.43 J2.48 J2.49 J2.54 J3.5 J4.5 J5.4 J5.7 J6.4 J6.7 J8.5 J9.5 J9.6 | length 23.7
  L 01 S w0.1: J2.54 v1(4.4,21.44) ; v1(5.2,24.56) J2.49 ; J2.48 v1(5.6,21.44) ; v1(6.4,24.56) J2.43 ; J2.42 v1(6.8,21.44) ; v1(7.6,24.56) J2.37 ; v1(8.8,24.56) J2.31 ; J2.30 v1(9.2,21.44) ; v1(10,24.56) J2.25 ; J2.24 v1(10.4,21.44) ; v1(11.2,24.56) J2.19 ; J2.18 v1(11.6,21.44) ; v1(12.4,24.56) J2.13 ; J2.12 v1(12.8,21.44)
  L 06 S w0.15: v1(4.4,6.89) J1.54 ; J1.49 v1(5.2,12.11) ; v1(5.6,6.89) J1.48 ; J1.43 v1(6.4,12.11) ; v1(6.8,6.89) J1.42 ; J1.37 v1(7.6,12.11) ; J1.31 v1(8.8,12.11) ; v1(9.2,6.89) J1.30 ; J1.25 v1(10,12.11) ; v1(10.4,6.89) J1.24 ; J1.19 v1(11.2,12.11) ; v1(11.6,6.89) J1.18 ; J1.13 v1(12.4,12.11) ; v1(12.8,6.89) J1.12
HSI: J1.10 J2.10 R25.1 | length 15.8
  L 01 S w0.1: J2.10 13.2,19.85 14.47,18.58 14.47,10.45 13.2,9.18 v1(13.2,8.77)
  L 06 S w0.1: R25.1 12.89,6.3 13.2,6.61 13.2,7.056 J1.10 v1(13.2,8.77)
HSIO: J1.2 J2.2 R28.1 | length 16.4
  L 01 S w0.1: J2.2 14.8,19.61 15.4,19.01 15.4,6.89 v1(15.05,6.54)
  L 06 S w0.1: J1.2 14.8,7.056 15.04,6.816 R28.1
HSO: J1.6 J2.6 R27.1 | length 15.7
  L 01 S w0.1: v1(14,8.77) 15.09,9.86 15.09,18.86 14,19.95 J2.6
  L 06 S w0.1: v1(14,8.77) J1.6 14,6.65 14.323,6.327 R27.1
HSRST: J1.8 J2.8 R26.1 | length 16.9
  L 01 S w0.1: J2.8 13.6,19.91 14.78,18.73 14.78,10.19 13.6,9.01 v1(13.6,6.54)
  L 06 S w0.1: J1.8@13.603,7.787 13.603,6.018 R26.1
JTAGEN: J1.57 J2.57 J7.1 | length 34.7
  L 01 S w0.1: v1(3.6,24.56) J2.57
  L 06 S w0.1: J7.1 3.6,38.38 v1(3.6,24.56) 3.6,23.9 2.46,22.76 2.46,20.51 2.99,19.98 2.99,13.68 3.6,13.07 J1.57
NetJ3_1: J3.1 R1.2 | length 13.3
  L 01 S w0.1: R1.2 9.535,8.5 9.71,8.325 9.71,6.657 13.437,2.93 18.27,2.93 18.5,2.7 J3.1
NetJ3_2: J3.2 R2.2 | length 13
  L 01 S w0.1: R2.2 10.085,8.5 9.93,8.345 9.93,6.72 13.52,3.13 18.29,3.13 18.5,3.34 J3.2
NetJ3_3: J3.3 R3.2 | length 12.1
  L 01 S w0.1: R3.2 10.885,7.525 10.885,6.732 12.477,5.14 15.993,5.14 17.366,6.514 17.366,7.514 17.863,8.01 18.27,8.01 18.5,7.78 J3.3
NetJ3_4: J3.4 R4.2 | length 11.8
  L 01 S w0.1: R4.2 11.26,7.7 11.105,7.545 11.105,6.795 12.56,5.34 15.91,5.34 17.166,6.596 17.166,7.596 17.78,8.21 18.29,8.21 18.5,8.42 J3.4
NetJ3_6: J3.6 R5.2 | length 18.3
  L 01 S w0.1: R5.2 11.935,8.5 12.09,8.345 12.09,6.752 12.912,5.93 15.453,5.93 16.24,6.717 16.24,14.657 17.213,15.63 18.27,15.63 18.5,15.4 J3.6
NetJ3_7: J3.7 R6.2 | length 18
  L 01 S w0.1: R6.2 12.485,8.5 12.29,8.305 12.29,6.834 12.994,6.13 15.37,6.13 16.04,6.8 16.04,14.74 17.13,15.83 18.29,15.83 18.5,16.04 J3.7
NetJ3_8: J3.8 R7.2 | length 14.5
  L 01 S w0.1: R7.2@12.09,27.08 11.915,27.255 11.915,27.562 12.263,27.91 14.44,27.91 15.2,27.15 15.2,21.65 16.14,20.71 18.27,20.71 18.5,20.48 J3.8
NetJ4_1: J4.1 R13.2 | length 13
  L 01 S w0.1: J4.1 -0.5,2.83 -0.29,3.04 5.233,3.04 8.705,6.512 8.705,7.545 8.86,7.7 R13.2
NetJ4_2: J4.2 R14.2 | length 12.6
  L 01 S w0.1: J4.2 -0.5,3.47 -0.27,3.24 5.15,3.24 8.485,6.575 8.485,7.525 R14.2 R14.2@8.285,7.7
NetJ4_3: J4.3 R15.2 | length 13.3
  L 01 S w0.1: J4.3 -0.5,7.91 -0.29,8.12 0.397,8.12 0.89,7.627 0.89,6.787 2.327,5.35 6.373,5.35 7.51,6.487 7.51,8.325 7.685,8.5 R15.2
NetJ4_4: J4.4 R16.2 | length 12.7
  L 01 S w0.1: J4.4 -0.5,8.55 -0.27,8.32 0.48,8.32 1.09,7.71 1.09,7.25 2.79,5.55 6.29,5.55 7.31,6.57 7.31,8.325 7.135,8.5 R16.2@7.11,8.5
NetJ4_6: J4.6 R17.2 | length 17.8
  L 01 S w0.1: J4.6 -0.5,15.53 -0.29,15.74 0.947,15.74 1.65,15.037 1.65,7.257 2.767,6.14 5.863,6.14 6.33,6.607 6.33,7.545 6.485,7.7 R17.2
NetJ4_7: J4.7 R18.2 | length 17.4
  L 01 S w0.1: J4.7 -0.5,16.17 -0.27,15.94 1.03,15.94 1.85,15.12 1.85,7.34 2.85,6.34 5.78,6.34 6.11,6.67 6.11,7.525 5.935,7.7 R18.2
NetJ4_8: J4.8 R19.2 | length 13.3
  L 01 S w0.1: J4.8 -0.5,20.61 -0.29,20.82 0.563,20.82 1.37,21.627 1.37,25.22 4.8,28.65 5.55,28.65 5.695,28.505 5.695,28.175 5.54,28.02 R19.2@5.515,28.02
NetJ5_1: J5.1 R20.2 | length 13.5
  L 01 S w0.1: J5.1 -0.5,21.25 -0.27,21.02 0.48,21.02 1.17,21.71 1.17,25.303 4.727,28.86 5.623,28.86 5.895,28.588 5.895,28.215 5.975,28.135 5.975,28.12 6.075,28.02 R20.2@6.09,28.02
NetJ5_2: J5.2 R21.2 | length 11.9
  L 01 S w0.1: J5.2@-0.4,24.66 -0.4,25.65 -0.19,25.86 0.363,25.86 1.31,26.807 3.963,29.46 6.24,29.46 6.895,28.805 6.895,27.235 6.74,27.08 R21.2@6.715,27.08
NetJ5_3: J5.3 R22.2 | length 12.2
  L 01 S w0.1: J5.3@-0.4,27.2 -0.4,26.29 -0.17,26.06 0.28,26.06 3.88,29.66 6.323,29.66 7.11,28.873 7.11,27.245 7.275,27.08 R22.2@7.29,27.08
NetJ5_5: J5.5 R23.2 | length 12.7
  L 01 S w0.1: J5.5 -0.5,33.31 -0.29,33.52 3.77,33.52 8.095,29.195 8.095,28.175 7.94,28.02 R23.2@7.915,28.02
NetJ5_6: J5.6 R24.2 | length 13
  L 01 S w0.1: J5.6 -0.5,33.95 -0.27,33.72 3.853,33.72 8.315,29.258 8.315,28.195 8.375,28.135 8.375,28.12 8.475,28.02 R24.2@8.49,28.02
NetJ6_1: J6.1 R8.2 | length 14.9
  L 01 S w0.1: R8.2@11.515,27.08 11.54,27.08 11.695,27.235 11.695,27.625 12.18,28.11 14.523,28.11 15.4,27.233 15.4,21.733 16.223,20.91 18.29,20.91 18.5,21.12 J6.1@18.5,22.11
NetJ6_2: J6.2 R9.2 | length 10.6
  L 01 S w0.1: R9.2@10.89,28.02 10.715,28.195 10.715,28.415 11.05,28.75 14.75,28.75 17.66,25.84 18.27,25.84 18.5,25.61 J6.2
NetJ6_3: J6.3 R10.2 | length 11
  L 01 S w0.1: R10.2@10.315,28.02 10.34,28.02 10.495,28.175 10.495,28.478 10.967,28.95 14.833,28.95 17.743,26.04 18.29,26.04 18.5,26.25 J6.3
NetJ6_5: J6.5 R11.2 | length 13.4
  L 01 S w0.1: R11.2@9.69,27.08 9.515,27.255 9.515,28.345 10.66,29.49 13.2,29.49 17.17,33.46 18.27,33.46 18.5,33.23 J6.5
NetJ6_6: J6.6 R12.2 | length 13.9
  L 01 S w0.1: R12.2@9.115,27.08 9.14,27.08 9.295,27.235 9.295,28.408 10.577,29.69 13.117,29.69 17.087,33.66 18.29,33.66 18.5,33.87 J6.6
NetJ6_8: J6.8 R25.2 | length 40.5
  L 06 S w0.1: R25.2 12.89,5.115 13.735,4.27 16.1,4.27 16.87,5.04 16.87,38.31 J6.8
NetJ8_1: J8.1 R26.2 | length 41.8
  L 06 S w0.1: R26.2 13.626,5.395 13.626,5.114 14.21,4.53 15.89,4.53 16.49,5.13 16.49,40.47 J8.1
NetJ8_2: J8.2 R27.2 | length 43.2
  L 06 S w0.1: R27.2 14.323,5.117 14.65,4.79 15.69,4.79 16.18,5.28 16.18,42.7 J8.2
NetJ8_3: J8.3 R28.2 | length 44.5
  L 06 S w0.1: R28.2 15.056,5.399 15.056,5.154 15.18,5.03 15.49,5.03 15.85,5.39 15.85,44.91 J8.3
REFCLK: J1.11 J2.11 J8.4 | length 44.9
  L 01 S w0.1: J2.11 v1(12.8,26.15) ; v1(12.8,47.35) 15.55,50.1 J8.4
  L 06 S w0.1: J1.11 12.8,12.6 14.09,13.89 14.09,19.93 13.39,20.63 13.39,22.37 12.8,22.96 v1(12.8,26.15) v1(12.8,47.35) v1@12.81,47.36
RFU1: J1.1 J2.1 J9.1 | length 45.5
  L 01 S w0.1: v1(14.8,24.56) J2.1
  L 06 S w0.1: J1.1 14.8,12.06 15.44,12.7 15.44,22.99 14.8,23.63 v1(14.8,24.56) 14.8,53.56 15.35,54.11 J9.1
RFU2_N: J1.52 J2.52 TP2.1 | length 14.8
  L 01 S w0.1: v1(4.688,9.62) 4.688,9.676 4.89,9.879 4.89,11.009 4.139,11.76 TP2.1 3.49,12.409 3.27,12.629 3.27,18.31 4.89,19.93 4.89,20.06 4.8,20.15 J2.52
  L 06 S w0.1: v1(4.688,9.62) 4.688,9.564 4.89,9.361 4.89,8.38 4.8,8.29 J1.52
RFU2_P: J1.50 J2.50 TP1.1 | length 14.8
  L 01 S w0.1: J2.50 5.2,20.15 5.11,20.06 5.11,19.839 3.49,18.219 3.49,12.72 3.64,12.57 TP1.1 4.31,11.9 5.11,11.1 5.11,9.879 5.313,9.676 v1(5.313,9.62)
  L 06 S w0.1: J1.50 5.2,8.29 5.11,8.38 5.11,9.361 5.313,9.564 v1(5.313,9.62)
RFU3_N: J1.58 J2.58 TP4.1 | length 14.6
  L 01 S w0.1: v1(3.488,8.82) 3.488,8.876 3.69,9.079 3.69,9.4 3.43,9.66 TP4.1 2.63,10.47 2.49,10.61 2.49,18.6 3.69,19.8 3.69,20.06 3.6,20.15 J2.58
  L 06 S w0.1: v1(3.488,8.82) 3.54,8.82 3.69,8.67 3.69,8.38 3.6,8.29 J1.58
RFU3_P: J1.56 J2.56 TP3.1 | length 14.5
  L 01 S w0.1: J2.56 4,20.15 3.91,20.06 3.91,19.709 2.71,18.509 2.71,10.701 2.821,10.59 TP3.1 3.51,9.891 3.91,9.491 3.91,9.079 4.113,8.876 v1(4.113,8.82)
  L 06 S w0.1: J1.56 4,8.29 3.91,8.38 3.91,8.67 4.06,8.82 v1(4.113,8.82)
SMB_ALERT: J1.3 J2.3 J9.2 | length 46
  L 01 S w0.1: J2.3 v1(14.4,26.15)
  L 06 S w0.1: J9.2 12.81,53.6 14.4,52.01 v1(14.4,26.15) 14.4,23.49 15.12,22.77 15.12,12.94 14.4,12.22 J1.3
SMB_SCL: J1.7 J2.7 J9.4 | length 48.9
  L 01 S w0.1: J2.7 v1(13.6,26.15)
  L 06 S w0.1: J9.4 8.98,53.93 10.61,53.93 13.6,50.94 v1(13.6,26.15) 13.6,23.19 13.83,22.96 13.83,21.13 14.48,20.48 14.48,13.47 13.6,12.59 J1.7
SMB_SDA: J1.5 J2.5 J9.3 | length 47
  L 01 S w0.1: v1(14,24.56) J2.5
  L 06 S w0.1: J9.3 14,51.45 v1(14,24.56) 14,23.43 14.8,22.63 14.8,13.19 14,12.39 J1.5
TCK: J1.59 J2.59 J5.8 | length 31.9
  L 01 S w0.1: J2.59 v1(3.2,26.15)
  L 06 S w0.1: J5.8 3.2,36.24 v1(3.2,26.15) 3.2,24.01 2.13,22.94 2.13,20.33 2.66,19.8 2.66,13.56 3.2,13.02 J1.59
TDI: J1.51 J2.51 J7.4 | length 42.5
  L 01 S w0.1: J2.51 v1(4.8,26.15)
  L 06 S w0.1: J7.4 4.8,44.8 v1(4.8,26.15) 4.8,23.6 4,22.8 4,19.06 4.01,19.05 4.01,13.91 4.8,13.12 J1.51
TDO: J1.53 J2.53 J7.3 | length 39.8
  L 01 S w0.1: v1(4.4,24.56) J2.53
  L 06 S w0.1: J7.3 4.4,42.66 v1(4.4,24.56) 4.4,23.72 3.64,22.96 3.64,13.91 4.4,13.15 J1.53
TMS: J1.55 J2.55 J7.2 | length 37.5
  L 01 S w0.1: J2.55 v1(4,26.15)
  L 06 S w0.1: J7.2 4,40.52 v1(4,26.15) 4,23.78 2.8,22.58 2.8,20.65 3.33,20.12 3.33,13.79 4,13.12 J1.55
VADJ: J1.36 J2.36 J7.5 | length 1.7
  L 01 S w0.1: J2.36 v1(8,21.44)
  L 06 S w0.15: v1(8,6.89) J1.36
pads on no net: H3.1 H4.1 PM1.0 PM2.0 PM3.0 PM4.0 PM5.0 PM6.0

## Polygon pours and split planes (outlines as drawn)
3.3V on L04 P "3.3V_L04_P000" (solid, remove dead copper, pour order 0): 20,-0.05 9.54,-0.05 9.54,57.48 19.95,57.48
5V on L04 P "5V_L04_P002" (solid, remove dead copper, pour order 2): -1.92,57.44 8.57,57.44 8.57,0 -2,0
VADJ on L03 P "VADJ_L03_P004" (solid, remove dead copper, pour order 4): 8.51,0 8.51,57.47 8.48,57.5 -2,57.5 -2,0
GND on L03 P "GND_L03_P006" (solid, remove dead copper, pour order 6): 9.54,57.44 9.6,57.5 19.99,57.5 19.99,0.11 19.91,0.03 9.54,0.03
GND on L02 G "GND_L02_P008" (solid, remove dead copper, pour order 8): -1.76,57.42 19.88,57.42 19.88,0.12 -1.62,0.12 -1.83,-0.09
GND on L05 G "GND_L05_P010" (solid, remove dead copper, pour order 10): -2.07,57.57 19.93,57.57 19.93,-0.06 -1.94,-0.06 -2,0

## Silkscreen, mask and mechanical layers (free items; w line width, h text height)
Top Overlay:
  text "CR99102-01" at 4.14,32.15 h1.2
PCB-Outline-GM6:
  the board outline again, w0.01
Assembly-Top-GM13:
  text "'.Project'-'.Revision'-'.VariantName'" at 3.453,62.1 h1.5
  text "Variant name:" at -12.547,62.029 h1.5
Assembly-Bot-GM14:
  text "'.Project'-'.Revision'-'.VariantName'" at 16,62.1 h1.5
  text "Variant name:" at 32,62.029 h1.5

## Dimensions
-0.5,39.94 to -0.5,42.48 on Dim-Top-GM1
-0.5,19.62 to -0.5,22.16 on Dim-Top-GM1
-0.5,1.84 to 9,3 on Dim-Top-GM1
-0.5,1.84 to 18.5,1.79 on Dim-Top-GM1
9,16.5 to 9,50.5 on Dim-Top-GM1
-2,0 to 9,3 on Dim-Top-GM1
9,3 to 20,0 on Dim-Top-GM1
10,9.5 to 9,3 on Dim-Top-GM1
20,57.5 to 20,0 on Dim-Top-GM1
-2,0 to 20,0 on Dim-Top-GM1
9,37 to 20,0 on Dim-Top-GM1

## Text inside footprints (layer, text, board x,y; h text height)
J1: Assembly-Bot-GM14 "59" at 4.1,10.5 h0.5; Assembly-Bot-GM14 "60" at 4.1,8 h0.5; Assembly-Bot-GM14 "2" at 14.8,8 h0.5; Assembly-Bot-GM14 "1" at 14.717,10.5 h0.5
J2: Assembly-Top-GM13 "2" at 14.9,22.1 h0.5 r180; Assembly-Top-GM13 "1" at 14.8,24.4 h0.5 r180; Assembly-Top-GM13 "59" at 4.1,24.4 h0.5 r180; Assembly-Top-GM13 "60" at 4.1,22.1 h0.5 r180
J3: Assembly-Top-GM13 "6" at 18.85,21.055 h0.7 r90; Assembly-Top-GM13 "1" at 18.9,-0.045 h0.7 r90
J4: Assembly-Top-GM13 "6" at -0.15,21.105 h0.7 r90; Assembly-Top-GM13 "1" at -0.1,0.005 h0.7 r90
J5: Assembly-Top-GM13 "6" at -0.15,41.425 h0.7 r90; Assembly-Top-GM13 "1" at -0.1,20.325 h0.7 r90
J6: Assembly-Top-GM13 "6" at 18.85,41.425 h0.7 r90; Assembly-Top-GM13 "1" at 18.9,20.325 h0.7 r90
J7: Assembly-Top-GM13 "6" at 0.05,56.805 h1 r90; Assembly-Top-GM13 "1" at 0.025,40.355 h1 r90
J8: Assembly-Top-GM13 "6" at 19.05,56.805 h1 r90; Assembly-Top-GM13 "1" at 19.025,40.355 h1 r90
J9: Assembly-Top-GM13 "6" at 2.97,52.67 h1; Assembly-Top-GM13 "1" at 17.475,55.705 h1 r180
Serial1: Assembly-Top-GM13 "SerialNr" at 6.624,46.483 h0.7
SNAP1: TDev-Notes-Top-GM11 "LS A connector" at 2.8,25.725 h0.7; TDev-Notes-Top-GM11 "LS B connector" at 25.66,25.75 h0.7; TDev-Notes-Top-GM11 "LS C connector" at 48.52,25.75 h0.7; TDev-Notes-Top-GM11 "HS Z connector" at 46.82,12.9 h0.7; TDev-Notes-Top-GM11 "HS Y connector" at 23.96,12.9 h0.7; TDev-Notes-Top-GM11 "HS X connector" at 1.1,12.9 h0.7; TDev-Notes-Top-GM11 "11" at 3.14,27 h0.7; TDev-Notes-Top-GM11 "12" at 3.14,32.1 h0.7; TDev-Notes-Top-GM11 "2" at 14.24,32.1 h0.7; TDev-Notes-Top-GM11 "1" at 14.44,27 h0.7; TDev-Notes-Top-GM11 "60" at 1.6,6.8 h0.7; TDev-Notes-Top-GM11 "59" at 1.6,11.6 h0.7; TDev-Notes-Top-GM11 "1" at 15.4,11.6 h0.7; TDev-Notes-Top-GM11 "2" at 15.3,6.8 h0.7; TDev-Notes-Top-GM11 "1" at 37.3,27 h0.7; TDev-Notes-Top-GM11 "2" at 37.1,32.1 h0.7; TDev-Notes-Top-GM11 "12" at 26,32.1 h0.7; TDev-Notes-Top-GM11 "11" at 26,27 h0.7; TDev-Notes-Top-GM11 "2" at 38.16,6.8 h0.7; TDev-Notes-Top-GM11 "1" at 38.26,11.6 h0.7; TDev-Notes-Top-GM11 "59" at 24.46,11.6 h0.7; TDev-Notes-Top-GM11 "60" at 24.46,6.8 h0.7; TDev-Notes-Top-GM11 "60" at 47.32,6.8 h0.7; TDev-Notes-Top-GM11 "59" at 47.32,11.6 h0.7; TDev-Notes-Top-GM11 "1" at 61.12,11.6 h0.7; TDev-Notes-Top-GM11 "2" at 61.02,6.8 h0.7; TDev-Notes-Top-GM11 "11" at 48.86,27 h0.7; TDev-Notes-Top-GM11 "12" at 48.86,32.1 h0.7; TDev-Notes-Top-GM11 "2" at 59.96,32.1 h0.7; TDev-Notes-Top-GM11 "1" at 60.16,27 h0.7
SNAP2: TDev-Notes-Top-GM11 "LS A connector" at 2.8,39.225 h0.7; TDev-Notes-Top-GM11 "LS B connector" at 25.66,39.25 h0.7; TDev-Notes-Top-GM11 "LS C connector" at 48.52,39.25 h0.7; TDev-Notes-Top-GM11 "HS Z connector" at 46.82,26.4 h0.7; TDev-Notes-Top-GM11 "HS Y connector" at 23.96,26.4 h0.7; TDev-Notes-Top-GM11 "HS X connector" at 1.1,26.4 h0.7; TDev-Notes-Top-GM11 "11" at 1.14,40.5 h0.7; TDev-Notes-Top-GM11 "12" at 1.14,45.6 h0.7; TDev-Notes-Top-GM11 "2" at 15.74,45.6 h0.7; TDev-Notes-Top-GM11 "1" at 15.94,40.5 h0.7; TDev-Notes-Top-GM11 "60" at 1.6,20.3 h0.7; TDev-Notes-Top-GM11 "59" at 1.6,25.1 h0.7; TDev-Notes-Top-GM11 "1" at 15.4,25.1 h0.7; TDev-Notes-Top-GM11 "2" at 15.3,20.3 h0.7; TDev-Notes-Top-GM11 "1" at 38.8,40.5 h0.7; TDev-Notes-Top-GM11 "2" at 38.6,45.6 h0.7; TDev-Notes-Top-GM11 "12" at 24,45.6 h0.7; TDev-Notes-Top-GM11 "11" at 24,40.5 h0.7; TDev-Notes-Top-GM11 "2" at 38.16,20.3 h0.7; TDev-Notes-Top-GM11 "1" at 38.26,25.1 h0.7; TDev-Notes-Top-GM11 "59" at 24.46,25.1 h0.7; TDev-Notes-Top-GM11 "60" at 24.46,20.3 h0.7; TDev-Notes-Top-GM11 "60" at 47.32,20.3 h0.7; TDev-Notes-Top-GM11 "59" at 47.32,25.1 h0.7; TDev-Notes-Top-GM11 "1" at 61.12,25.1 h0.7; TDev-Notes-Top-GM11 "2" at 61.02,20.3 h0.7; TDev-Notes-Top-GM11 "11" at 46.86,40.5 h0.7; TDev-Notes-Top-GM11 "12" at 46.86,45.6 h0.7; TDev-Notes-Top-GM11 "2" at 61.46,45.6 h0.7; TDev-Notes-Top-GM11 "1" at 61.66,40.5 h0.7